# EAGLE board wordclock-satellite-led-r1 (EAGLE 5.11)
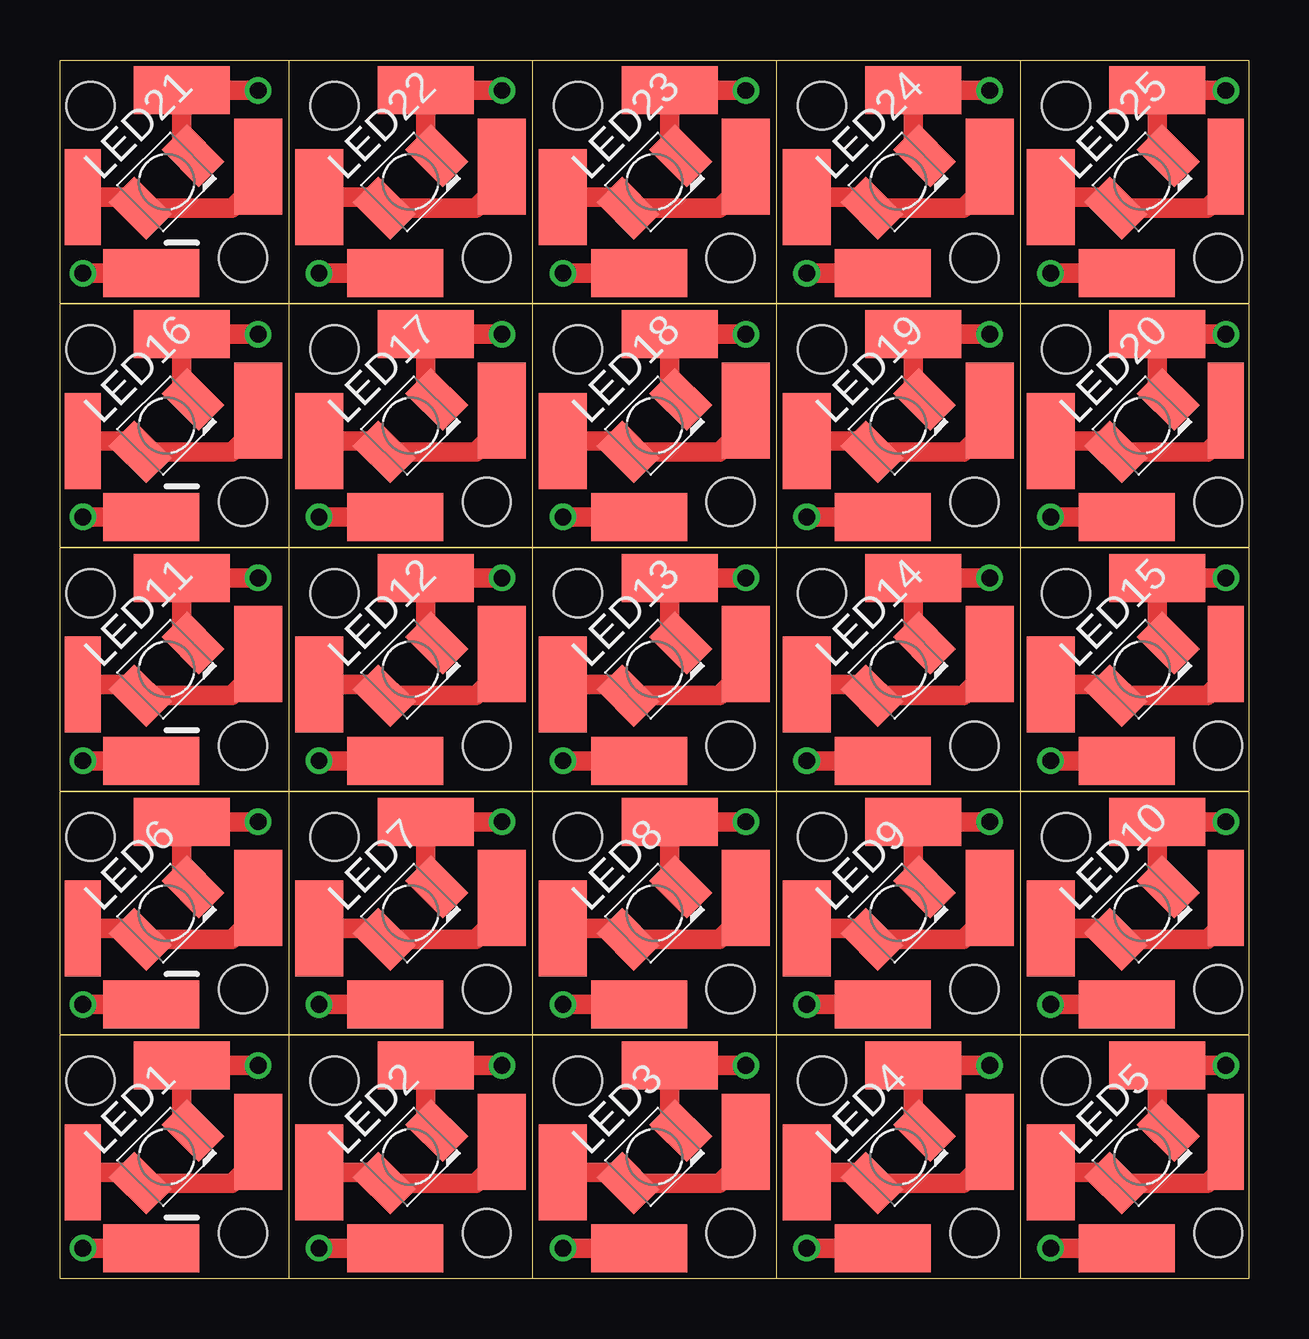
[diagram p0: board, top side]
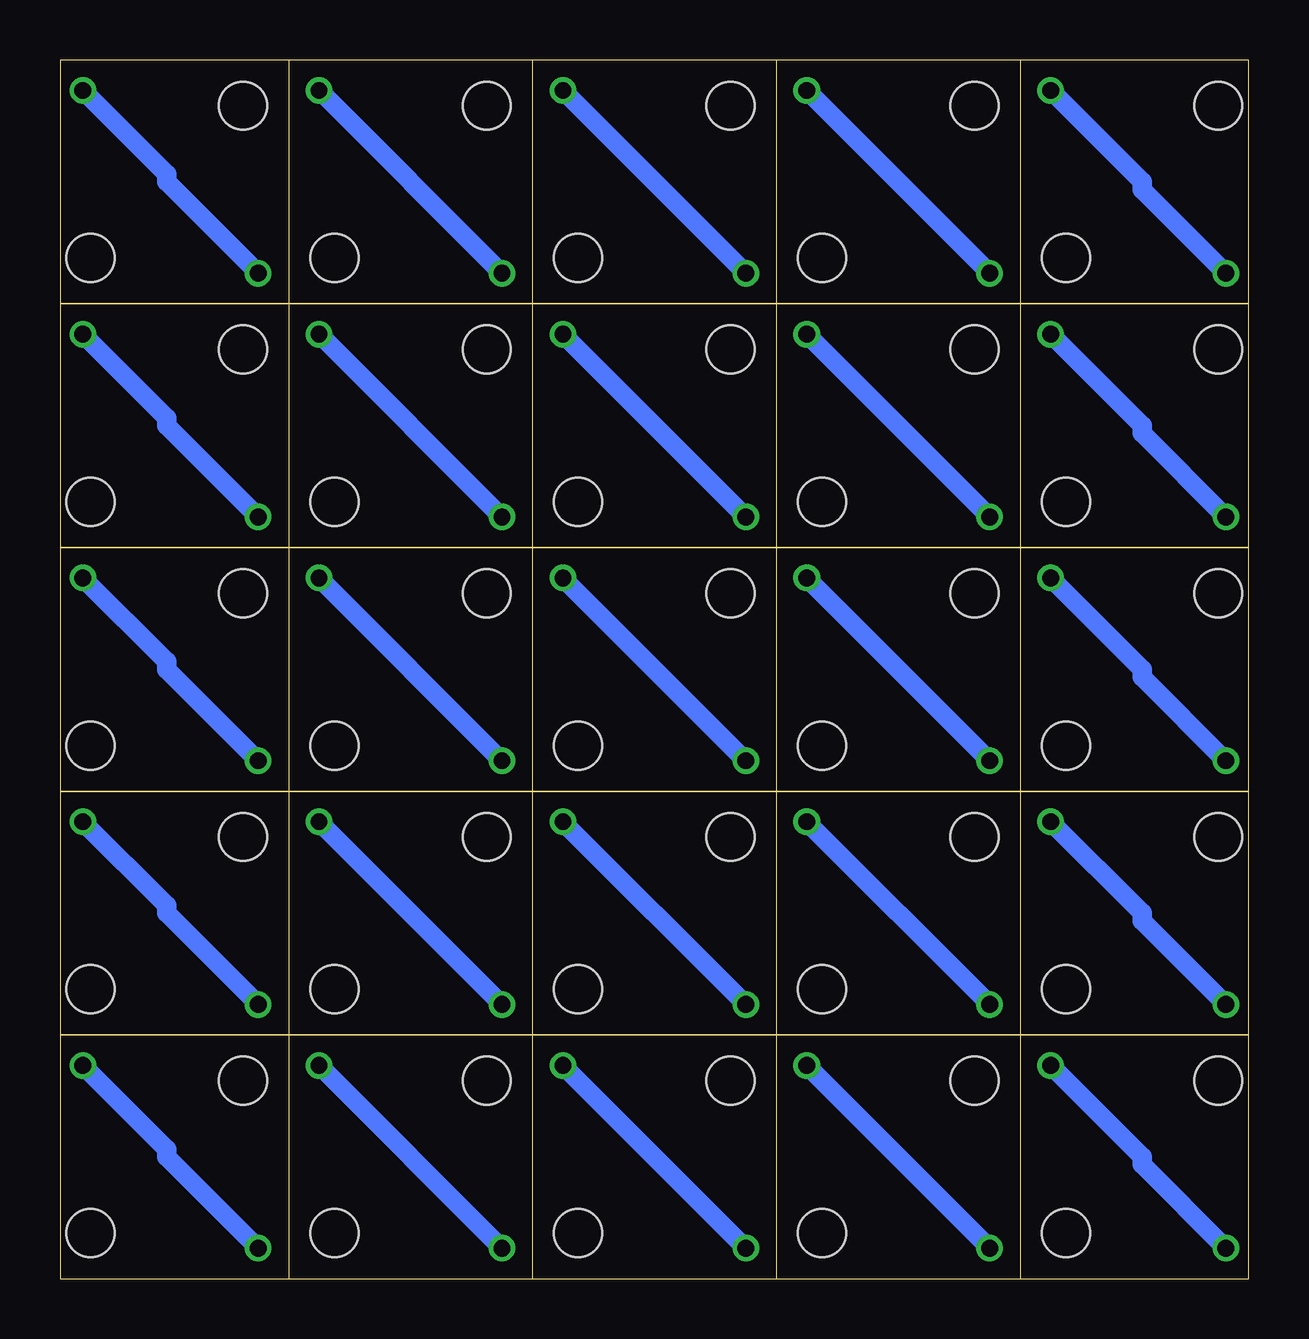
[diagram p1: board, bottom side, seen from below]

Size 49.53 x 50.8 mm. Coordinates in mm from the lower left corner, seen from the top.
Outline: 0,10.16 0,0 9.53,0
Outline: 0,10.16 9.53,10.16
Outline: 9.53,10.16 9.53,0
Outline: 19.68,0 9.53,0
Outline: 19.68,10.16 19.68,0
Outline: 9.53,10.16 19.68,10.16
Outline: 29.84,0 19.68,0
Outline: 29.84,10.16 29.84,0
Outline: 40.01,0 29.84,0
Outline: 40.01,10.16 40.01,0
Outline: 40.01,0 49.53,0 49.53,10.16
Outline: 19.68,10.16 29.84,10.16
Outline: 29.84,10.16 40.01,10.16
Outline: 40.01,10.16 49.53,10.16
Outline: 0,10.16 0,20.32
Outline: 0,20.32 9.53,20.32
Outline: 9.53,20.32 9.53,10.16
Outline: 9.53,10.16 0,10.16
Outline: 19.68,10.16 9.53,10.16
Outline: 19.68,20.32 19.68,10.16
Outline: 9.53,20.32 19.68,20.32
Outline: 29.84,10.16 19.68,10.16
Outline: 29.84,20.32 29.84,10.16
Outline: 40.01,10.16 29.84,10.16
Outline: 40.01,20.32 40.01,10.16
Outline: 49.53,10.16 40.01,10.16
Outline: 49.53,20.32 49.53,10.16
Outline: 19.68,20.32 29.84,20.32
Outline: 29.84,20.32 40.01,20.32
Outline: 40.01,20.32 49.53,20.32
Outline: 0,20.32 0,30.48
Outline: 0,30.48 9.53,30.48
Outline: 9.53,30.48 9.53,20.32
Outline: 9.53,20.32 0,20.32
Outline: 19.68,20.32 9.53,20.32
Outline: 19.68,30.48 19.68,20.32
Outline: 9.53,30.48 19.68,30.48
Outline: 29.84,20.32 19.68,20.32
Outline: 29.84,30.48 29.84,20.32
Outline: 40.01,20.32 29.84,20.32
Outline: 40.01,30.48 40.01,20.32
Outline: 49.53,20.32 40.01,20.32
Outline: 49.53,30.48 49.53,20.32
Outline: 19.68,30.48 29.84,30.48
Outline: 29.84,30.48 40.01,30.48
Outline: 40.01,30.48 49.53,30.48
Outline: 0,30.48 0,40.64
Outline: 0,40.64 9.53,40.64
Outline: 9.53,40.64 9.53,30.48
Outline: 9.53,30.48 0,30.48
Outline: 19.68,30.48 9.53,30.48
Outline: 19.68,40.64 19.68,30.48
Outline: 9.53,40.64 19.68,40.64
Outline: 29.84,30.48 19.68,30.48
Outline: 29.84,40.64 29.84,30.48
Outline: 40.01,30.48 29.84,30.48
Outline: 40.01,40.64 40.01,30.48
Outline: 49.53,30.48 40.01,30.48
Outline: 49.53,40.64 49.53,30.48
Outline: 19.68,40.64 29.84,40.64
Outline: 29.84,40.64 40.01,40.64
Outline: 40.01,40.64 49.53,40.64
Outline: 0,40.64 0,50.8 9.53,50.8
Outline: 9.53,50.8 9.53,40.64
Outline: 9.53,40.64 0,40.64
Outline: 19.68,40.64 9.53,40.64
Outline: 19.68,50.8 19.68,40.64
Outline: 9.53,50.8 19.68,50.8
Outline: 29.84,40.64 19.68,40.64
Outline: 29.84,50.8 29.84,40.64
Outline: 40.01,40.64 29.84,40.64
Outline: 40.01,50.8 40.01,40.64
Outline: 49.53,40.64 40.01,40.64
Outline: 49.53,40.64 49.53,50.8 40.01,50.8
Outline: 19.68,50.8 29.84,50.8
Outline: 29.84,50.8 40.01,50.8
Copper layers (1*16): Top 0.035mm / dielectric 1.5mm / Bottom 0.035mm
Design rules "default *": minimum track width 10mil, minimum drill 24mil, track to track 8mil, track to pad 8mil, pad to pad 8mil, via to via 8mil, smd to smd 8mil, copper to edge 10mil, drill to drill 8mil, minimum pad ring 10mil, minimum via ring 8mil, stop-mask expansion 4mil, vias tented up to drill 0mil, thermal gap 10mil
Holes 2 mm at 1.27,8.26 7.62,1.91 17.78,1.91 11.43,8.26 21.59,8.26 27.94,1.91 38.1,1.91 31.75,8.26 41.91,8.26 48.26,1.91 1.27,18.41 7.62,12.06 17.78,12.06 11.43,18.41 21.59,18.41 27.94,12.06 38.1,12.06 31.75,18.41 41.91,18.41 48.26,12.06 1.27,28.57 7.62,22.23 17.78,22.23 11.43,28.57 21.59,28.57 27.94,22.23 38.1,22.23 31.75,28.57 41.91,28.57 48.26,22.23 1.27,38.73 7.62,32.38 17.78,32.38 11.43,38.73 21.59,38.73 27.94,32.38 38.1,32.38 31.75,38.73 41.91,38.73 48.26,32.38 1.27,48.9 7.62,42.55 17.78,42.55 11.43,48.9 21.59,48.9 27.94,42.55 38.1,42.55 31.75,48.9 41.91,48.9 48.26,42.55

## Footprints (pad centres in the part's own frame; a part is rotated, then mirrored left to right if it is on the bottom)
KA-3528ASYC = smd 1.5 x 2.2: A -1.55,0; C 1.55,0
PAD-1.5X4 = smd 4 x 1.5: P$1 0,0
PAD-2X4 = smd 4 x 2: P$1 0,0

## Placement (x,y rotation side)
LED1  [KA-3528ASYC]  4.45,5.08 45 top
LED2  [KA-3528ASYC]  14.61,5.08 45 top
LED3  [KA-3528ASYC]  24.77,5.08 45 top
LED4  [KA-3528ASYC]  34.92,5.08 45 top
LED5  [KA-3528ASYC]  45.09,5.08 45 top
LED6  [KA-3528ASYC]  4.45,15.24 45 top
LED7  [KA-3528ASYC]  14.61,15.24 45 top
LED8  [KA-3528ASYC]  24.77,15.24 45 top
LED9  [KA-3528ASYC]  34.92,15.24 45 top
LED10  [KA-3528ASYC]  45.09,15.24 45 top
LED11  [KA-3528ASYC]  4.45,25.4 45 top
LED12  [KA-3528ASYC]  14.61,25.4 45 top
LED13  [KA-3528ASYC]  24.77,25.4 45 top
LED14  [KA-3528ASYC]  34.92,25.4 45 top
LED15  [KA-3528ASYC]  45.09,25.4 45 top
LED16  [KA-3528ASYC]  4.45,35.56 45 top
LED17  [KA-3528ASYC]  14.61,35.56 45 top
LED18  [KA-3528ASYC]  24.77,35.56 45 top
LED19  [KA-3528ASYC]  34.92,35.56 45 top
LED20  [KA-3528ASYC]  45.09,35.56 45 top
LED21  [KA-3528ASYC]  4.45,45.72 45 top
LED22  [KA-3528ASYC]  14.61,45.72 45 top
LED23  [KA-3528ASYC]  24.77,45.72 45 top
LED24  [KA-3528ASYC]  34.92,45.72 45 top
LED25  [KA-3528ASYC]  45.09,45.72 45 top
X1  PAD-1.5X4  [PAD-1.5X4]  0.95,4.45 90 top
X2  PAD-2X4  [PAD-2X4]  8.26,5.71 90 top
X3  PAD-2X4  [PAD-2X4]  3.81,1.27 0 top
X4  PAD-2X4  [PAD-2X4]  5.08,8.89 0 top
X5  PAD-2X4  [PAD-2X4]  10.79,4.45 90 top
X6  PAD-2X4  [PAD-2X4]  18.41,5.71 90 top
X7  PAD-2X4  [PAD-2X4]  15.24,8.89 0 top
X8  PAD-2X4  [PAD-2X4]  13.97,1.27 0 top
X9  PAD-2X4  [PAD-2X4]  20.95,4.45 90 top
X10  PAD-2X4  [PAD-2X4]  28.57,5.71 90 top
X11  PAD-2X4  [PAD-2X4]  25.4,8.89 0 top
X12  PAD-2X4  [PAD-2X4]  24.13,1.27 0 top
X13  PAD-2X4  [PAD-2X4]  31.11,4.45 90 top
X14  PAD-2X4  [PAD-2X4]  38.73,5.71 90 top
X15  PAD-2X4  [PAD-2X4]  35.56,8.89 0 top
X16  PAD-2X4  [PAD-2X4]  34.29,1.27 0 top
X17  PAD-2X4  [PAD-2X4]  41.27,4.45 90 top
X18  PAD-1.5X4  [PAD-1.5X4]  48.58,5.71 90 top
X19  PAD-2X4  [PAD-2X4]  44.45,1.27 180 top
X20  PAD-2X4  [PAD-2X4]  45.72,8.89 0 top
X21  PAD-1.5X4  [PAD-1.5X4]  0.95,14.61 90 top
X22  PAD-2X4  [PAD-2X4]  8.26,15.88 90 top
X23  PAD-2X4  [PAD-2X4]  3.81,11.43 0 top
X24  PAD-2X4  [PAD-2X4]  5.08,19.05 0 top
X25  PAD-2X4  [PAD-2X4]  10.79,14.61 90 top
X26  PAD-2X4  [PAD-2X4]  18.41,15.88 90 top
X27  PAD-2X4  [PAD-2X4]  15.24,19.05 0 top
X28  PAD-2X4  [PAD-2X4]  13.97,11.43 0 top
X29  PAD-2X4  [PAD-2X4]  20.95,14.61 90 top
X30  PAD-2X4  [PAD-2X4]  28.57,15.88 90 top
X31  PAD-2X4  [PAD-2X4]  25.4,19.05 0 top
X32  PAD-2X4  [PAD-2X4]  24.13,11.43 0 top
X33  PAD-2X4  [PAD-2X4]  31.11,14.61 90 top
X34  PAD-2X4  [PAD-2X4]  38.73,15.88 90 top
X35  PAD-2X4  [PAD-2X4]  35.56,19.05 0 top
X36  PAD-2X4  [PAD-2X4]  34.29,11.43 0 top
X37  PAD-2X4  [PAD-2X4]  41.27,14.61 90 top
X38  PAD-1.5X4  [PAD-1.5X4]  48.58,15.88 90 top
X39  PAD-2X4  [PAD-2X4]  44.45,11.43 180 top
X40  PAD-2X4  [PAD-2X4]  45.72,19.05 0 top
X41  PAD-1.5X4  [PAD-1.5X4]  0.95,24.77 90 top
X42  PAD-2X4  [PAD-2X4]  8.26,26.04 90 top
X43  PAD-2X4  [PAD-2X4]  3.81,21.59 0 top
X44  PAD-2X4  [PAD-2X4]  5.08,29.21 0 top
X45  PAD-2X4  [PAD-2X4]  10.79,24.77 90 top
X46  PAD-2X4  [PAD-2X4]  18.41,26.04 90 top
X47  PAD-2X4  [PAD-2X4]  15.24,29.21 0 top
X48  PAD-2X4  [PAD-2X4]  13.97,21.59 0 top
X49  PAD-2X4  [PAD-2X4]  20.95,24.77 90 top
X50  PAD-2X4  [PAD-2X4]  28.57,26.04 90 top
X51  PAD-2X4  [PAD-2X4]  25.4,29.21 0 top
X52  PAD-2X4  [PAD-2X4]  24.13,21.59 0 top
X53  PAD-2X4  [PAD-2X4]  31.11,24.77 90 top
X54  PAD-2X4  [PAD-2X4]  38.73,26.04 90 top
X55  PAD-2X4  [PAD-2X4]  35.56,29.21 0 top
X56  PAD-2X4  [PAD-2X4]  34.29,21.59 0 top
X57  PAD-2X4  [PAD-2X4]  41.27,24.77 90 top
X58  PAD-1.5X4  [PAD-1.5X4]  48.58,26.04 90 top
X59  PAD-2X4  [PAD-2X4]  44.45,21.59 180 top
X60  PAD-2X4  [PAD-2X4]  45.72,29.21 0 top
X61  PAD-1.5X4  [PAD-1.5X4]  0.95,34.92 90 top
X62  PAD-2X4  [PAD-2X4]  8.26,36.2 90 top
X63  PAD-2X4  [PAD-2X4]  3.81,31.75 0 top
X64  PAD-2X4  [PAD-2X4]  5.08,39.37 0 top
X65  PAD-2X4  [PAD-2X4]  10.79,34.92 90 top
X66  PAD-2X4  [PAD-2X4]  18.41,36.2 90 top
X67  PAD-2X4  [PAD-2X4]  15.24,39.37 0 top
X68  PAD-2X4  [PAD-2X4]  13.97,31.75 0 top
X69  PAD-2X4  [PAD-2X4]  20.95,34.92 90 top
X70  PAD-2X4  [PAD-2X4]  28.57,36.2 90 top
X71  PAD-2X4  [PAD-2X4]  25.4,39.37 0 top
X72  PAD-2X4  [PAD-2X4]  24.13,31.75 0 top
X73  PAD-2X4  [PAD-2X4]  31.11,34.92 90 top
X74  PAD-2X4  [PAD-2X4]  38.73,36.2 90 top
X75  PAD-2X4  [PAD-2X4]  35.56,39.37 0 top
X76  PAD-2X4  [PAD-2X4]  34.29,31.75 0 top
X77  PAD-2X4  [PAD-2X4]  41.27,34.92 90 top
X78  PAD-1.5X4  [PAD-1.5X4]  48.58,36.2 90 top
X79  PAD-2X4  [PAD-2X4]  44.45,31.75 180 top
X80  PAD-2X4  [PAD-2X4]  45.72,39.37 0 top
X81  PAD-1.5X4  [PAD-1.5X4]  0.95,45.09 90 top
X82  PAD-2X4  [PAD-2X4]  8.26,46.35 90 top
X83  PAD-2X4  [PAD-2X4]  3.81,41.91 0 top
X84  PAD-2X4  [PAD-2X4]  5.08,49.53 0 top
X85  PAD-2X4  [PAD-2X4]  10.79,45.09 90 top
X86  PAD-2X4  [PAD-2X4]  18.41,46.35 90 top
X87  PAD-2X4  [PAD-2X4]  15.24,49.53 0 top
X88  PAD-2X4  [PAD-2X4]  13.97,41.91 0 top
X89  PAD-2X4  [PAD-2X4]  20.95,45.09 90 top
X90  PAD-2X4  [PAD-2X4]  28.57,46.35 90 top
X91  PAD-2X4  [PAD-2X4]  25.4,49.53 0 top
X92  PAD-2X4  [PAD-2X4]  24.13,41.91 0 top
X93  PAD-2X4  [PAD-2X4]  31.11,45.09 90 top
X94  PAD-2X4  [PAD-2X4]  38.73,46.35 90 top
X95  PAD-2X4  [PAD-2X4]  35.56,49.53 0 top
X96  PAD-2X4  [PAD-2X4]  34.29,41.91 0 top
X97  PAD-2X4  [PAD-2X4]  41.27,45.09 90 top
X98  PAD-1.5X4  [PAD-1.5X4]  48.58,46.35 90 top
X99  PAD-2X4  [PAD-2X4]  44.45,41.91 180 top
X100  PAD-2X4  [PAD-2X4]  45.72,49.53 0 top

## Library data of the parts
LED1-LED25 = led
X1-X100 = rbg-generic-pads

## Nets
K1: LED1.C X3.P$1 X4.P$1
K2: LED2.C X7.P$1 X8.P$1
K3: LED3.C X11.P$1 X12.P$1
K4: LED4.C X15.P$1 X16.P$1
K5: LED5.C X19.P$1 X20.P$1
K6: LED6.C X23.P$1 X24.P$1
K7: LED7.C X27.P$1 X28.P$1
K8: LED8.C X31.P$1 X32.P$1
K9: LED9.C X35.P$1 X36.P$1
K10: LED10.C X39.P$1 X40.P$1
K11: LED11.C X43.P$1 X44.P$1
K12: LED12.C X47.P$1 X48.P$1
K13: LED13.C X51.P$1 X52.P$1
K14: LED14.C X55.P$1 X56.P$1
K15: LED15.C X59.P$1 X60.P$1
K16: LED16.C X63.P$1 X64.P$1
K17: LED17.C X67.P$1 X68.P$1
K18: LED18.C X71.P$1 X72.P$1
K19: LED19.C X75.P$1 X76.P$1
K20: LED20.C X79.P$1 X80.P$1
K21: LED21.C X83.P$1 X84.P$1
K22: LED22.C X87.P$1 X88.P$1
K23: LED23.C X91.P$1 X92.P$1
K24: LED24.C X95.P$1 X96.P$1
K25: LED25.C X99.P$1 X100.P$1
N$1: LED1.A X1.P$1 X2.P$1
N$2: LED2.A X5.P$1 X6.P$1
N$3: LED3.A X9.P$1 X10.P$1
N$4: LED4.A X13.P$1 X14.P$1
N$5: LED5.A X17.P$1 X18.P$1
N$6: LED6.A X21.P$1 X22.P$1
N$7: LED7.A X25.P$1 X26.P$1
N$8: LED8.A X29.P$1 X30.P$1
N$9: LED9.A X33.P$1 X34.P$1
N$10: LED10.A X37.P$1 X38.P$1
N$11: LED11.A X41.P$1 X42.P$1
N$12: LED12.A X45.P$1 X46.P$1
N$13: LED13.A X49.P$1 X50.P$1
N$14: LED14.A X53.P$1 X54.P$1
N$15: LED15.A X57.P$1 X58.P$1
N$16: LED16.A X61.P$1 X62.P$1
N$17: LED17.A X65.P$1 X66.P$1
N$18: LED18.A X69.P$1 X70.P$1
N$19: LED19.A X73.P$1 X74.P$1
N$20: LED20.A X77.P$1 X78.P$1
N$21: LED21.A X81.P$1 X82.P$1
N$22: LED22.A X85.P$1 X86.P$1
N$23: LED23.A X89.P$1 X90.P$1
N$24: LED24.A X93.P$1 X94.P$1
N$25: LED25.A X97.P$1 X98.P$1

## Tracks (layer width: path | path; a pad name or v marks a point on that pad's centre or on a via)
K1  (via drill 0.7)
  Top 0.813: LED1.C 5.08,6.64 X4.P$1 v8.26,8.89 | v0.95,1.27 X3.P$1
  Bottom 0.813: v0.95,1.27 4.45,4.76 4.45,5.08 v8.26,8.89
K2  (via drill 0.7)
  Top 0.813: LED2.C 15.24,6.64 X7.P$1 v18.41,8.89 | v10.79,1.27 X8.P$1
  Bottom 0.813: v10.79,1.27 v18.41,8.89
K3  (via drill 0.7)
  Top 0.813: LED3.C 25.4,6.64 X11.P$1 v28.57,8.89 | v20.95,1.27 X12.P$1
  Bottom 0.813: v20.95,1.27 v28.57,8.89
K4  (via drill 0.7)
  Top 0.813: LED4.C 35.56,6.64 X15.P$1 v38.73,8.89 | v31.11,1.27 X16.P$1
  Bottom 0.813: v31.11,1.27 v38.73,8.89
K5  (via drill 0.7)
  Top 0.813: LED5.C 45.72,6.64 X20.P$1 v48.58,8.89 | v41.27,1.27 X19.P$1
  Bottom 0.813: v41.27,1.27 45.09,5.08 45.09,5.4 v48.58,8.89
K6  (via drill 0.7)
  Top 0.813: LED6.C 5.08,16.8 X24.P$1 v8.26,19.05 | v0.95,11.43 X23.P$1
  Bottom 0.813: v0.95,11.43 4.45,14.92 4.45,15.24 v8.26,19.05
K7  (via drill 0.7)
  Top 0.813: LED7.C 15.24,16.8 X27.P$1 v18.41,19.05 | v10.79,11.43 X28.P$1
  Bottom 0.813: v10.79,11.43 v18.41,19.05
K8  (via drill 0.7)
  Top 0.813: LED8.C 25.4,16.8 X31.P$1 v28.57,19.05 | v20.95,11.43 X32.P$1
  Bottom 0.813: v20.95,11.43 v28.57,19.05
K9  (via drill 0.7)
  Top 0.813: LED9.C 35.56,16.8 X35.P$1 v38.73,19.05 | v31.11,11.43 X36.P$1
  Bottom 0.813: v31.11,11.43 v38.73,19.05
K10  (via drill 0.7)
  Top 0.813: LED10.C 45.72,16.8 X40.P$1 v48.58,19.05 | v41.27,11.43 X39.P$1
  Bottom 0.813: v41.27,11.43 45.09,15.24 45.09,15.56 v48.58,19.05
K11  (via drill 0.7)
  Top 0.813: LED11.C 5.08,26.96 X44.P$1 v8.26,29.21 | v0.95,21.59 X43.P$1
  Bottom 0.813: v0.95,21.59 4.45,25.08 4.45,25.4 v8.26,29.21
K12  (via drill 0.7)
  Top 0.813: LED12.C 15.24,26.96 X47.P$1 v18.41,29.21 | v10.79,21.59 X48.P$1
  Bottom 0.813: v10.79,21.59 v18.41,29.21
K13  (via drill 0.7)
  Top 0.813: LED13.C 25.4,26.96 X51.P$1 v28.57,29.21 | v20.95,21.59 X52.P$1
  Bottom 0.813: v20.95,21.59 v28.57,29.21
K14  (via drill 0.7)
  Top 0.813: LED14.C 35.56,26.96 X55.P$1 v38.73,29.21 | v31.11,21.59 X56.P$1
  Bottom 0.813: v31.11,21.59 v38.73,29.21
K15  (via drill 0.7)
  Top 0.813: LED15.C 45.72,26.96 X60.P$1 v48.58,29.21 | v41.27,21.59 X59.P$1
  Bottom 0.813: v41.27,21.59 45.09,25.4 45.09,25.72 v48.58,29.21
K16  (via drill 0.7)
  Top 0.813: LED16.C 5.08,37.12 X64.P$1 v8.26,39.37 | v0.95,31.75 X63.P$1
  Bottom 0.813: v0.95,31.75 4.45,35.24 4.45,35.56 v8.26,39.37
K17  (via drill 0.7)
  Top 0.813: LED17.C 15.24,37.12 X67.P$1 v18.41,39.37 | v10.79,31.75 X68.P$1
  Bottom 0.813: v10.79,31.75 v18.41,39.37
K18  (via drill 0.7)
  Top 0.813: LED18.C 25.4,37.12 X71.P$1 v28.57,39.37 | v20.95,31.75 X72.P$1
  Bottom 0.813: v20.95,31.75 v28.57,39.37
K19  (via drill 0.7)
  Top 0.813: LED19.C 35.56,37.12 X75.P$1 v38.73,39.37 | v31.11,31.75 X76.P$1
  Bottom 0.813: v31.11,31.75 v38.73,39.37
K20  (via drill 0.7)
  Top 0.813: LED20.C 45.72,37.12 X80.P$1 v48.58,39.37 | v41.27,31.75 X79.P$1
  Bottom 0.813: v41.27,31.75 45.09,35.56 45.09,35.88 v48.58,39.37
K21  (via drill 0.7)
  Top 0.813: LED21.C 5.08,47.28 X84.P$1 v8.26,49.53 | v0.95,41.91 X83.P$1
  Bottom 0.813: v0.95,41.91 4.45,45.4 4.45,45.72 v8.26,49.53
K22  (via drill 0.7)
  Top 0.813: LED22.C 15.24,47.28 X87.P$1 v18.41,49.53 | v10.79,41.91 X88.P$1
  Bottom 0.813: v10.79,41.91 v18.41,49.53
K23  (via drill 0.7)
  Top 0.813: LED23.C 25.4,47.28 X91.P$1 v28.57,49.53 | v20.95,41.91 X92.P$1
  Bottom 0.813: v20.95,41.91 v28.57,49.53
K24  (via drill 0.7)
  Top 0.813: LED24.C 35.56,47.28 X95.P$1 v38.73,49.53 | v31.11,41.91 X96.P$1
  Bottom 0.813: v31.11,41.91 v38.73,49.53
K25  (via drill 0.7)
  Top 0.813: LED25.C 45.72,47.28 X100.P$1 v48.58,49.53 | v41.27,41.91 X99.P$1
  Bottom 0.813: v41.27,41.91 45.09,45.72 45.09,46.04 v48.58,49.53
N$1
  Top 0.813: X1.P$1 2.89,4.45 LED1.A 7.16,3.98 8.26,5.08 X2.P$1
N$2
  Top 0.813: X5.P$1 13.05,4.45 LED2.A 17.32,3.98 18.41,5.08 X6.P$1
N$3
  Top 0.813: X9.P$1 23.21,4.45 LED3.A 27.48,3.98 28.57,5.08 X10.P$1
N$4
  Top 0.813: X13.P$1 33.37,4.45 LED4.A 37.64,3.98 38.73,5.08 X14.P$1
N$5
  Top 0.813: X17.P$1 43.53,4.45 LED5.A 47.8,3.98 48.26,4.45 48.26,5.4 X18.P$1
N$6
  Top 0.813: X21.P$1 2.89,14.61 LED6.A 7.16,14.14 8.26,15.24 X22.P$1
N$7
  Top 0.813: X25.P$1 13.05,14.61 LED7.A 17.32,14.14 18.41,15.24 X26.P$1
N$8
  Top 0.813: X29.P$1 23.21,14.61 LED8.A 27.48,14.14 28.57,15.24 X30.P$1
N$9
  Top 0.813: X33.P$1 33.37,14.61 LED9.A 37.64,14.14 38.73,15.24 X34.P$1
N$10
  Top 0.813: X37.P$1 43.53,14.61 LED10.A 47.8,14.14 48.26,14.61 48.26,15.56 X38.P$1
N$11
  Top 0.813: X41.P$1 2.89,24.77 LED11.A 7.16,24.3 8.26,25.4 X42.P$1
N$12
  Top 0.813: X45.P$1 13.05,24.77 LED12.A 17.32,24.3 18.41,25.4 X46.P$1
N$13
  Top 0.813: X49.P$1 23.21,24.77 LED13.A 27.48,24.3 28.57,25.4 X50.P$1
N$14
  Top 0.813: X53.P$1 33.37,24.77 LED14.A 37.64,24.3 38.73,25.4 X54.P$1
N$15
  Top 0.813: X57.P$1 43.53,24.77 LED15.A 47.8,24.3 48.26,24.77 48.26,25.72 X58.P$1
N$16
  Top 0.813: X61.P$1 2.89,34.92 LED16.A 7.16,34.46 8.26,35.56 X62.P$1
N$17
  Top 0.813: X65.P$1 13.05,34.92 LED17.A 17.32,34.46 18.41,35.56 X66.P$1
N$18
  Top 0.813: X69.P$1 23.21,34.92 LED18.A 27.48,34.46 28.57,35.56 X70.P$1
N$19
  Top 0.813: X73.P$1 33.37,34.92 LED19.A 37.64,34.46 38.73,35.56 X74.P$1
N$20
  Top 0.813: X77.P$1 43.53,34.92 LED20.A 47.8,34.46 48.26,34.92 48.26,35.88 X78.P$1
N$21
  Top 0.813: X81.P$1 2.89,45.09 LED21.A 7.16,44.62 8.26,45.72 X82.P$1
N$22
  Top 0.813: X85.P$1 13.05,45.09 LED22.A 17.32,44.62 18.41,45.72 X86.P$1
N$23
  Top 0.813: X89.P$1 23.21,45.09 LED23.A 27.48,44.62 28.57,45.72 X90.P$1
N$24
  Top 0.813: X93.P$1 33.37,45.09 LED24.A 37.64,44.62 38.73,45.72 X94.P$1
N$25
  Top 0.813: X97.P$1 43.53,45.09 LED25.A 47.8,44.62 48.26,45.09 48.26,46.04 X98.P$1